# EAGLE board ENGI301 Project Actual (EAGLE 8.7.1)
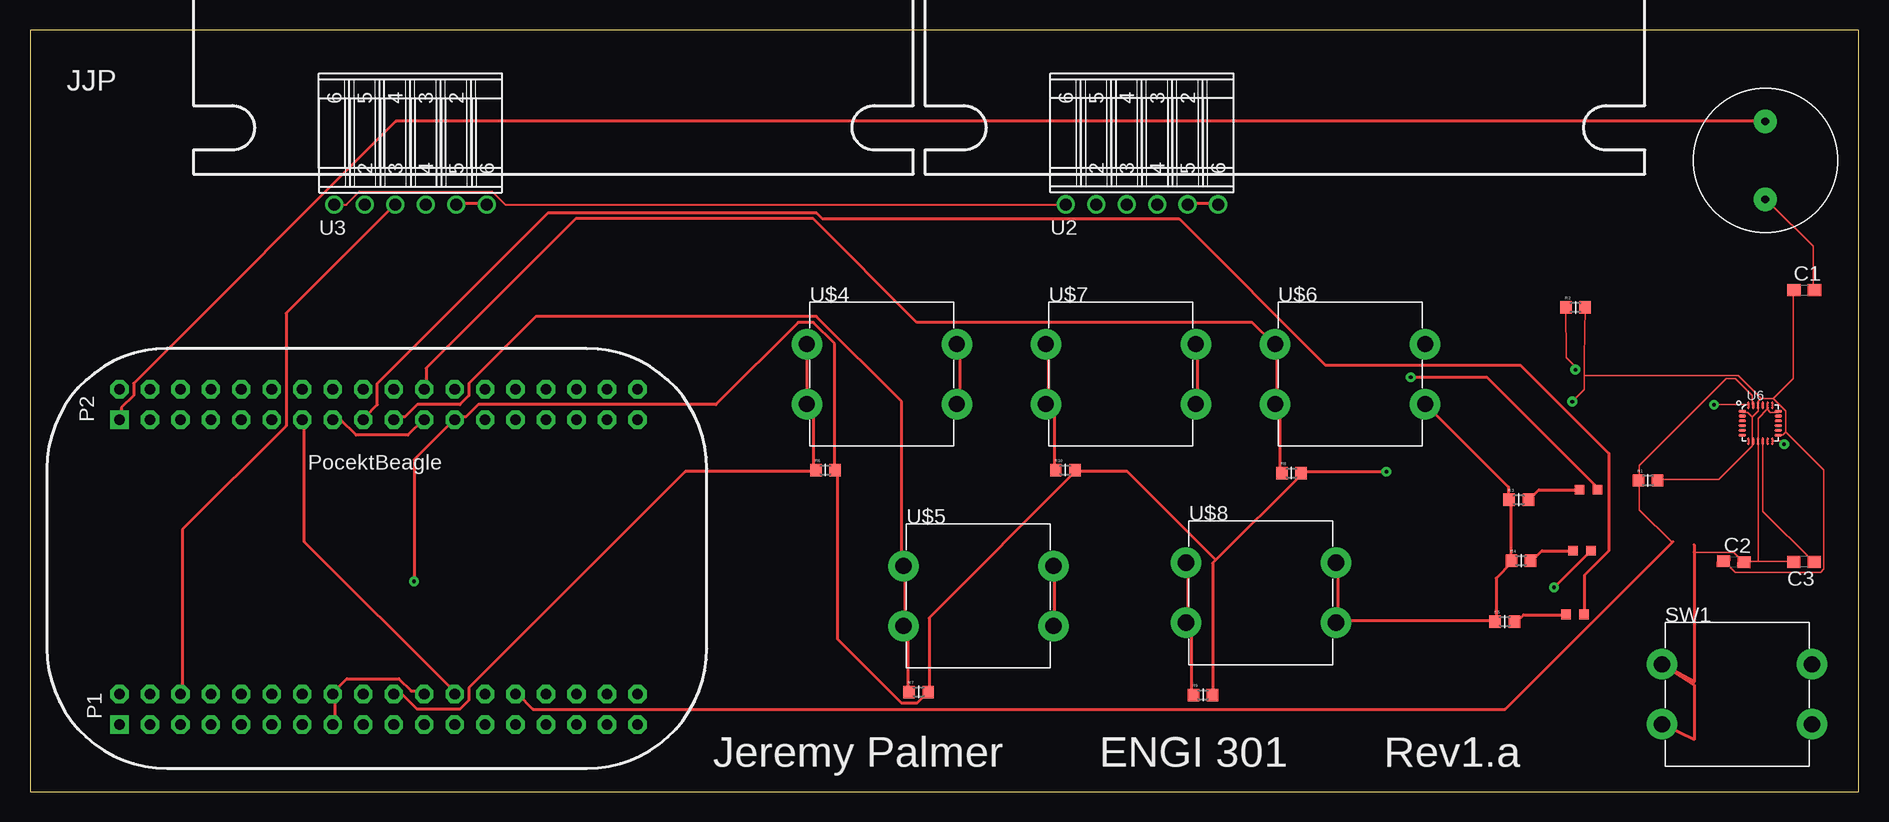
[diagram p0: board, top side]
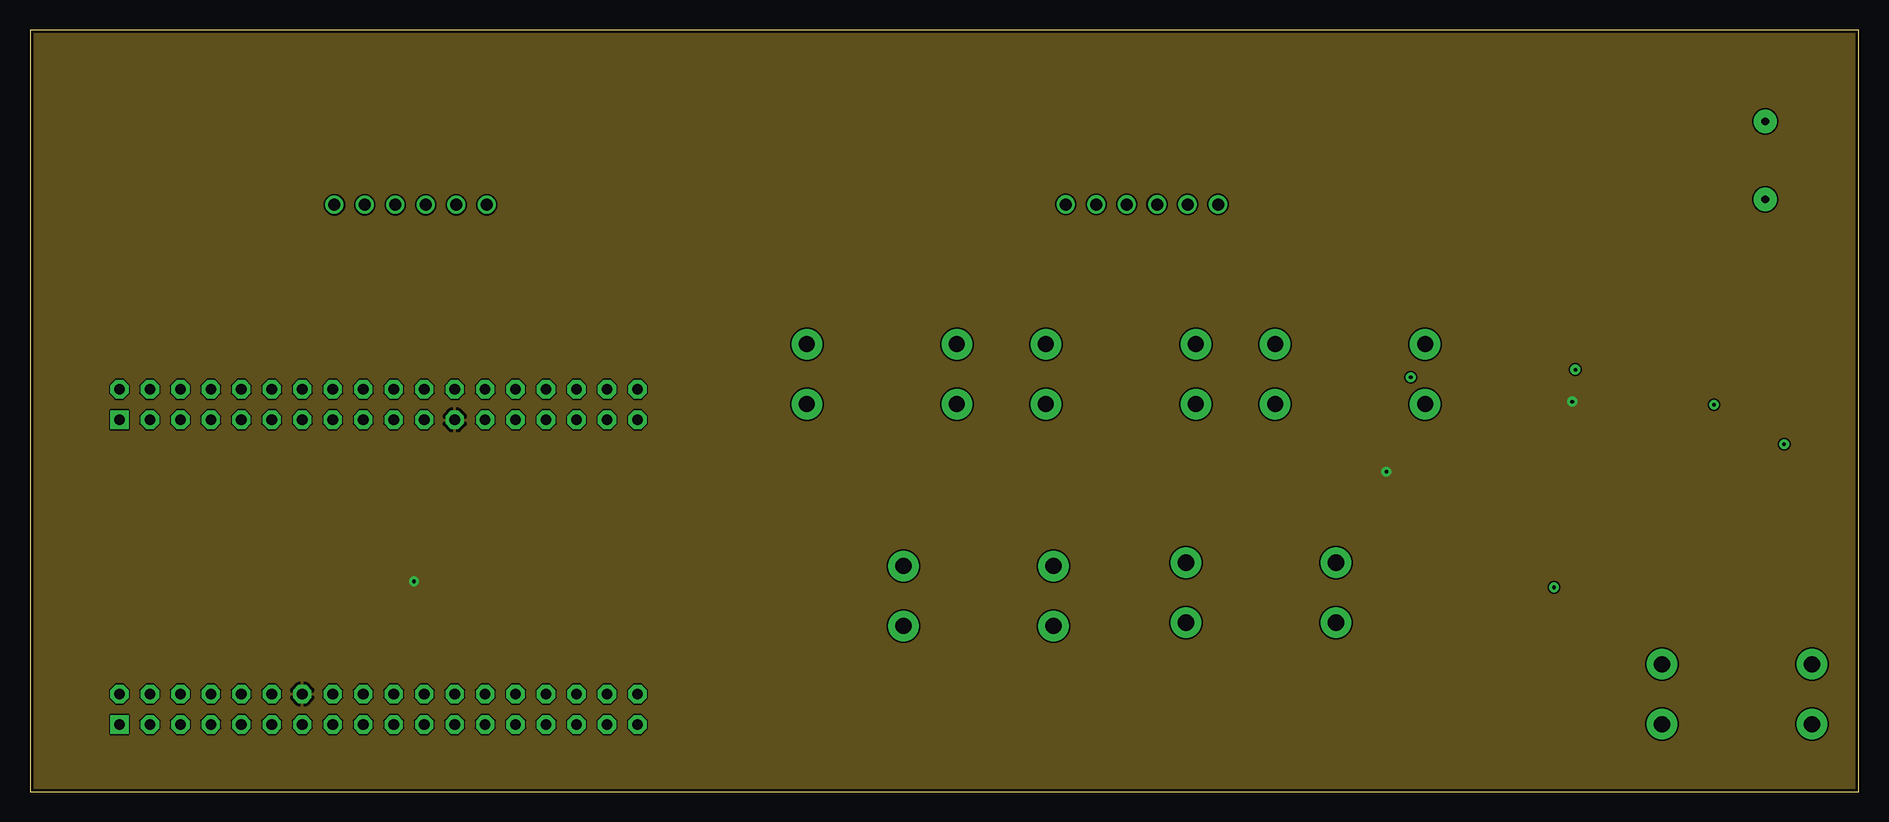
[diagram p1: board, inner layer Route2]
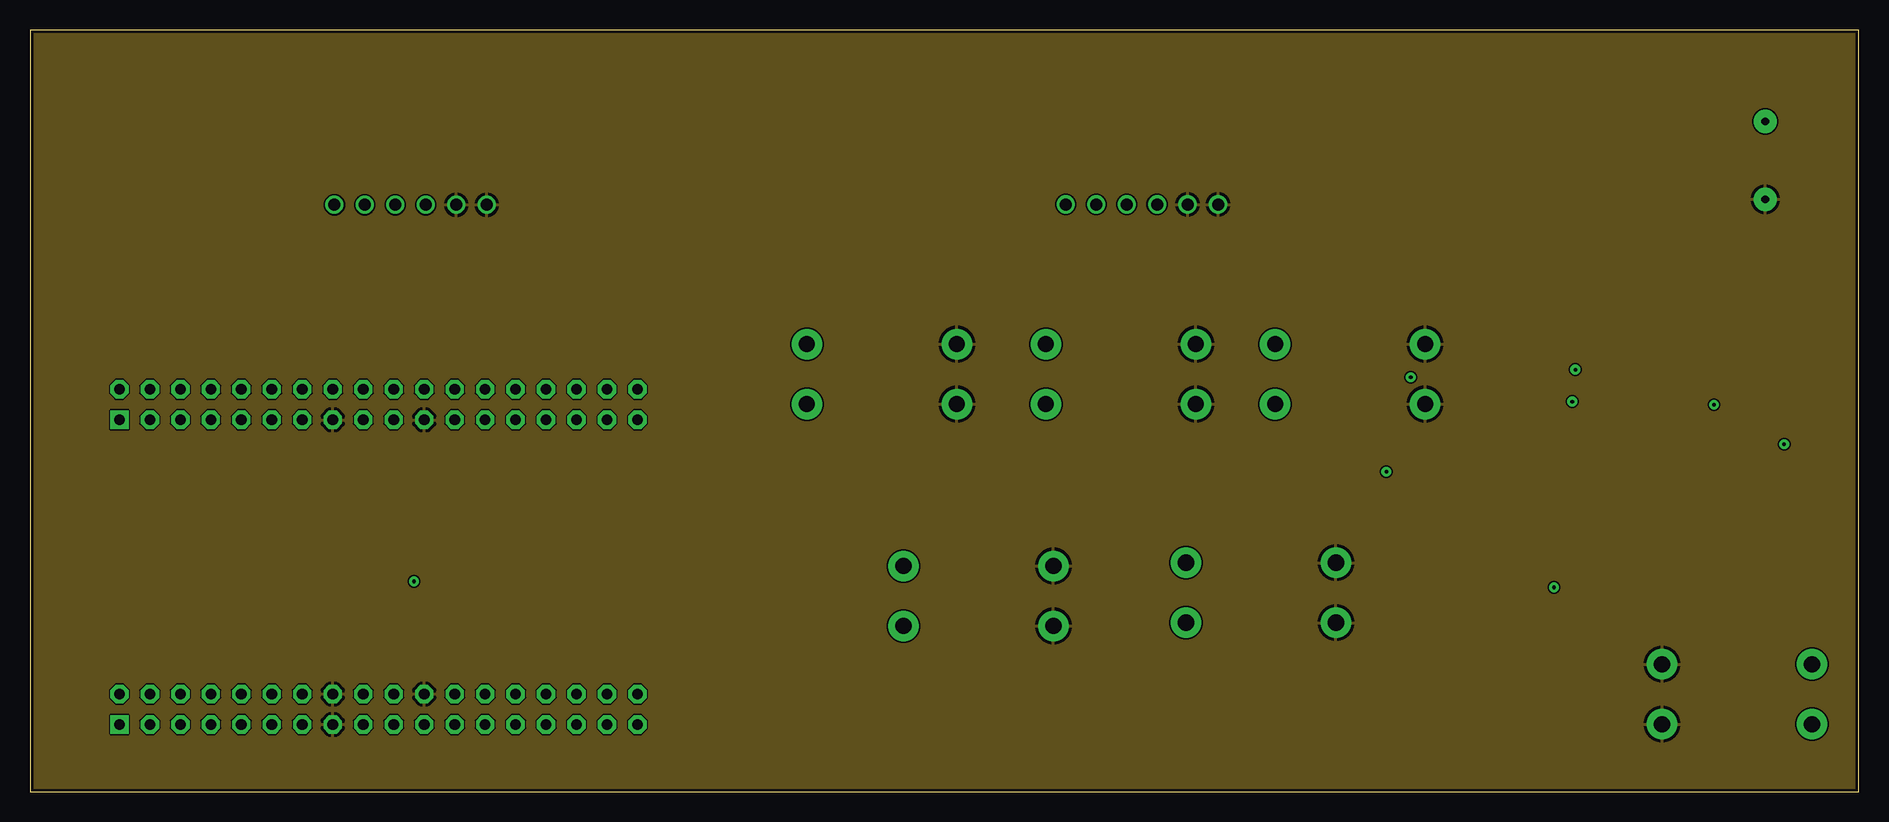
[diagram p2: board, inner layer Route15]
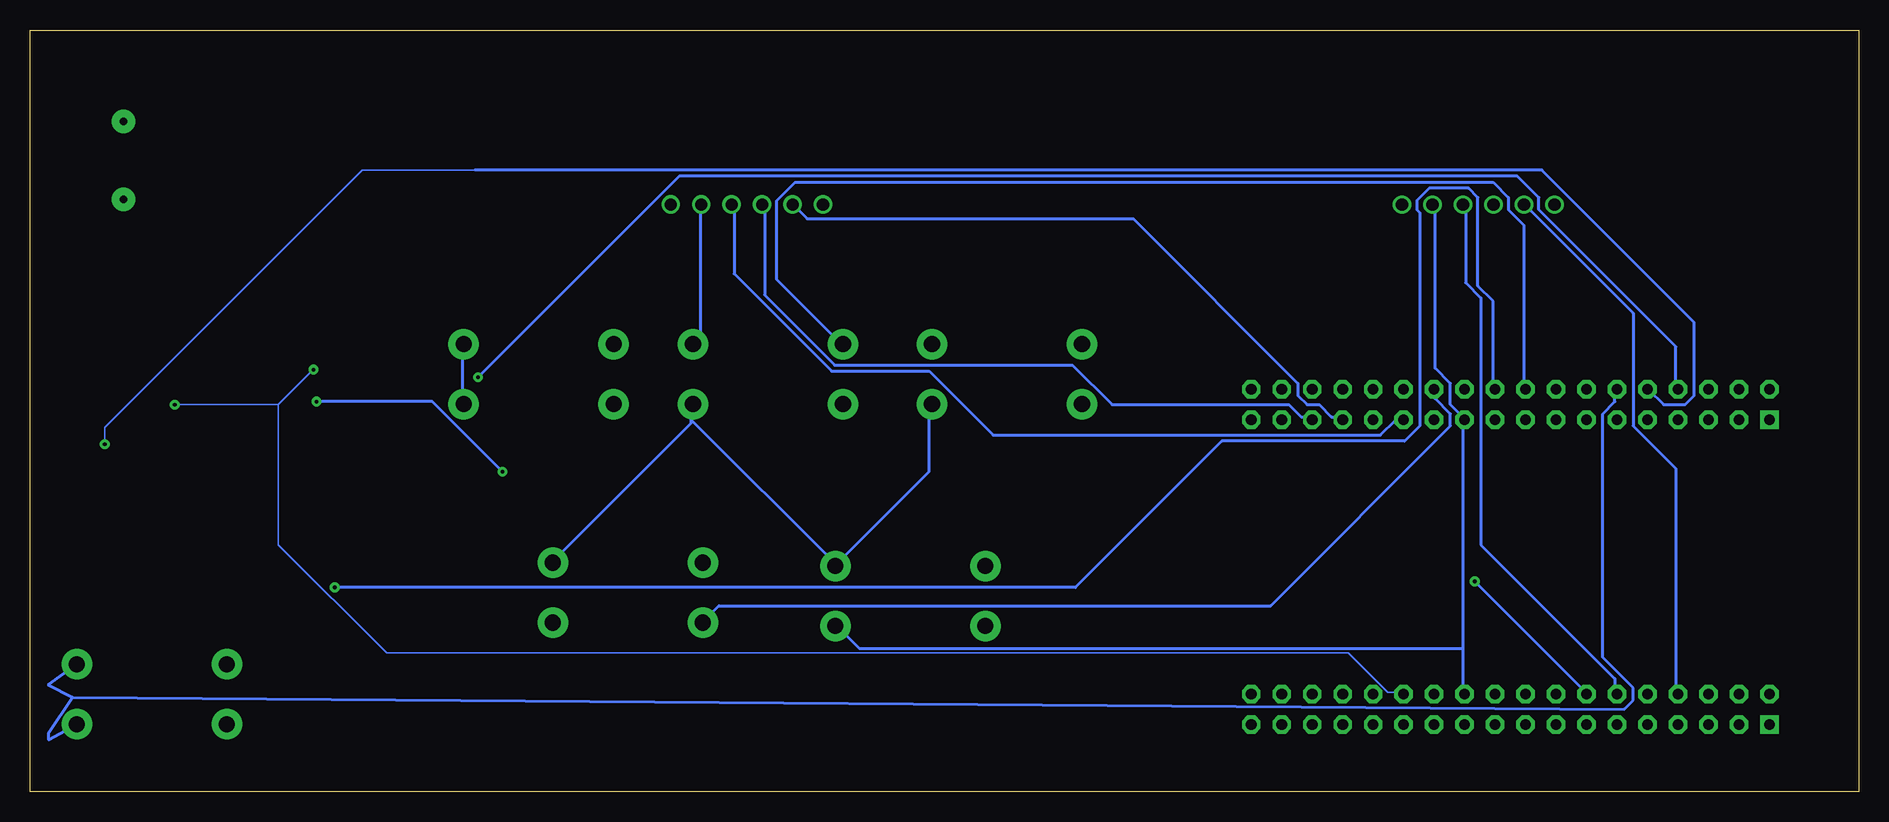
[diagram p3: board, bottom side, seen from below]

Size 152.4 x 63.5 mm. Coordinates in mm from the lower left corner, seen from the top.
Outline: 0,0 152.4,0 152.4,63.5 0,63.5 0,0
Copper layers (1*2*15*16): Top 0.035mm / dielectric 0.23mm / Route2 0.035mm / dielectric 0.93mm / Route15 0.035mm / dielectric 0.23mm / Bottom 0.035mm
Design rules "ENGI301_Maze_Project_4lyr *": minimum track width 5mil, minimum drill 12mil, track to track 5mil, track to pad 5mil, pad to pad 5mil, via to via 10mil, smd to smd 10mil, copper to edge 10mil, drill to drill 12mil, minimum pad ring 10mil, minimum via ring 10mil, stop-mask expansion 3mil, vias tented up to drill 25mil, thermal gap 10mil

## Footprints (pad centres in the part's own frame; a part is rotated, then mirrored left to right if it is on the bottom)
C0603 = smd 1.1 x 1: 1 -0.85,0; 2 0.85,0
R0603 = smd 0.95 x 1.031: 1 -0.8,0; 2 0.8,0
BUTTON = drill 1.35 pad 2.54: P$1 -6.25,2.5; P$2 -6.25,-2.5; P$3 6.25,2.5; P$4 6.25,-2.5
POCKETBEAGLE = drill 0.889 pad 1.524 square: 1 5.91,3.53; 37 5.91,28.93 | drill 0.889 pad 1.524 octagon: 2 5.91,6.07; 3 8.45,3.53; 4 8.45,6.07; 5 10.99,3.53; 6 10.99,6.07; 7 13.53,3.53; 8 13.53,6.07; 9 16.07,3.53; 10 16.07,6.07; 11 18.61,3.53; 12 18.61,6.07; 13 21.15,3.53; 14 21.15,6.07; 15 23.69,3.53; 16 23.69,6.07; 17 26.23,3.53; 18 26.23,6.07; 19 28.77,3.53; 20 28.77,6.07; 21 31.31,3.53; 22 31.31,6.07; 23 33.85,3.53; 24 33.85,6.07; 25 36.39,3.53; 26 36.39,6.07; 27 38.93,3.53; 28 38.93,6.07; 29 41.47,3.53; 30 41.47,6.07; 31 44.01,3.53; 32 44.01,6.07; 33 46.55,3.53; 34 46.55,6.07; 35 49.09,3.53; 36 49.09,6.07; 38 5.91,31.47; 39 8.45,28.93; 40 8.45,31.47; 41 10.99,28.93; 42 10.99,31.47; 43 13.53,28.93; 44 13.53,31.47; 45 16.07,28.93; 46 16.07,31.47; 47 18.61,28.93; 48 18.61,31.47; 49 21.15,28.93; 50 21.15,31.47; 51 23.69,28.93; 52 23.69,31.47; 53 26.23,28.93; 54 26.23,31.47; 55 28.77,28.93; 56 28.77,31.47; 57 31.31,28.93; 58 31.31,31.47; 59 33.85,28.93; 60 33.85,31.47; 61 36.39,28.93; 62 36.39,31.47; 63 38.93,28.93; 64 38.93,31.47; 65 41.47,28.93; 66 41.47,31.47; 67 44.01,28.93; 68 44.01,31.47; 69 46.55,28.93; 70 46.55,31.47; 71 49.09,28.93; 72 49.09,31.47
FE06W = drill 1.016: 1 -6.35,0; 2 -3.81,0; 3 -1.27,0; 4 1.27,0; 5 3.81,0; 6 6.35,0
QFN3 = smd 0.6 x 0.2: P$1 -1.5,1; P$2 -1.5,0.6; P$3 -1.5,0.2; P$4 -1.5,-0.2; P$5 -1.5,-0.6; P$6 -1.5,-1; P$13 1.5,-1; P$14 1.5,-0.6; P$15 1.5,-0.2; P$16 1.5,0.2; P$17 1.5,0.6; P$18 1.5,1 | smd 0.2 x 0.6: P$7 -1,-1.5; P$8 -0.6,-1.5; P$9 -0.2,-1.5; P$10 0.2,-1.5; P$11 0.6,-1.5; P$12 1,-1.5; P$19 1,1.5; P$20 0.6,1.5; P$21 0.2,1.5; P$22 -0.2,1.5; P$23 -0.6,1.5; P$24 -1,1.5
LED = smd 0.8 x 0.8: P$1 -0.75,0; P$2 0.75,0
BUZZER = drill 0.65 pad 1.93: P$1 0,3.25; P$2 0,-3.25

## Placement (x,y rotation side)
C1  0.1uF  [C0603]  147.86,41.81 0 top
C2  10uF  [C0603]  141.97,19.17 357.4 top
C3  0.1uF  [C0603]  147.83,19.17 180 top
R1  2.2k  [R0603]  134.83,25.94 0 top
R2  2.2k  [R0603]  128.8,40.36 0 top
R3  1k  [R0603]  124.06,24.33 0 top
R4  1k  [R0603]  124.25,19.25 0 top
R5  1k  [R0603]  122.9,14.17 0 top
R6  [R0603]  66.29,26.8 0 top
R7  [R0603]  74.05,8.3 0 top
R8  [R0603]  105.12,26.55 0 top
R9  [R0603]  97.75,8.05 0 top
R10  [R0603]  86.28,26.8 0 top
SW1  [BUTTON]  142.25,8.11 0 top
U1  POCKETBEAGLE  [POCKETBEAGLE]  1.54,2.06 0 top
U2  MOD-LED8X8RGB-CONN  [FE06W]  92.66,48.95 0 top
U3  MOD-LED8X8RGB-CONN  [FE06W]  31.71,48.93 0 top
U6  [QFN3]  144.2,30.71 0 top
U$1  [LED]  129.87,25.18 0 top
U$2  [LED]  129.33,20.1 0 top
U$3  [LED]  128.75,14.77 0 top
U$4  [BUTTON]  70.99,34.81 0 top
U$5  [BUTTON]  79.04,16.31 0 top
U$6  [BUTTON]  110.01,34.81 0 top
U$7  [BUTTON]  90.9,34.81 0 top
U$8  [BUTTON]  102.58,16.58 0 top
U$10  [BUZZER]  144.61,52.63 0 top
U$11  [MOD-LED8X8RGB]  73.61,51.49 90 top
U$12  [MOD-LED8X8RGB]  73.61,112.45 90 top  (outside the outline)
U$13  [MOD-LED8X8RGB]  134.57,51.49 90 top
U$14  [MOD-LED8X8RGB]  134.57,112.45 90 top  (outside the outline)

## Library data of the parts
C1-C3 R1-R10 SW1 U1-U3 U6 U$1-U$8 U$10 = ENGI301 Project 2a
U$11-U$14 = ENGI301_Maze_Project_Parts

## Nets
BTN0: R6.1 U1.20 U$4.P$1 U$4.P$2
BTN1: R7.1 U1.55 U$5.P$1 U$5.P$2
BTN2: R8.1 U1.58 U$6.P$1 U$6.P$2
BTN3: R10.1 U1.54 U$7.P$1 U$7.P$2
BTN4: R9.1 U1.60 U$8.P$1 U$8.P$2
BUZZER: U1.37 U$10.P$1
GND: C1.2 C2.2 C3.2 R3.1 R4.1 R5.1 SW1.P$1 SW1.P$2 U1.15 U1.16 U1.22 U1.51 U1.57 U2.5 U2.6 U3.5 U3.6 U6.P$9 U6.P$18 U6.P$20 U$4.P$3 U$4.P$4 U$5.P$3 U$5.P$4 U$6.P$3 U$6.P$4 U$7.P$3 U$7.P$4 U$8.P$3 U$8.P$4 U$10.P$2
I2C2.SCL: R1.1 U1.28 U6.P$23
I2C2.SDA: R2.1 U1.26 U6.P$24
LED0: U1.44 U$1.P$2
LED1: U1.56 U$2.P$2
LED2: U1.53 U$3.P$2
LED_ARRAY0.CS: U1.67 U2.3
LED_ARRAY0.MOSI: U1.61 U2.4
LED_ARRAY0.SCLK: U1.65 U2.2
LED_ARRAY1.CS: U1.6 U3.3
LED_ARRAY1.MOSI: U1.12 U3.4
LED_ARRAY1.SCLK: U1.8 U3.2
MPU_TNT: U1.46 U6.P$12
N$1: SW1.P$3 SW1.P$4 U1.48
N$21: U2.1 U3.1
N$23: R3.2 U$1.P$1
N$24: R4.2 U$2.P$1
N$25: R5.2 U$3.P$1
N$32: C3.1 U6.P$10
SYS_VDD1_3P3V: C1.1 C2.1 R1.2 R2.2 R6.2 R7.2 R8.2 R9.2 R10.2 U1.14 U1.59 U6.P$1 U6.P$8 U6.P$13 U6.P$22
SYS_VDD1_5V: U1.24 U1.49

## Tracks (layer width: path | path; a pad name or v marks a point on that pad's centre or on a via)
BTN0
  Top 0.254: U1.20 30.48,8.13 30.99,8.13 32.26,6.86 35.81,6.86 36.58,7.62 36.58,8.64 54.61,26.67 65.28,26.67 R6.1 65.28,26.92 65.28,31.75 64.77,32.26 U$4.P$2 64.77,32.51 64.77,37.08 U$4.P$1
BTN1
  Top 0.254: R7.1 73.15,8.38 73.15,13.46 72.9,13.72 U$5.P$2 72.9,13.97 72.9,18.8 U$5.P$1 72.64,19.05 72.64,32.51 65.53,39.62 42.16,39.62 36.58,34.04 36.58,33.02 35.81,32.26 32.26,32.26 31.24,31.24 30.48,31.24 U1.55
BTN2
  Top 0.254: R8.1 104.14,26.67 104.14,32 103.89,32.26 U$6.P$2 103.89,32.51 103.89,37.08 U$6.P$1 103.63,37.34 101.85,39.12 73.91,39.12 65.28,47.75 45.47,47.75 33.02,35.31 33.02,33.78 U1.58
BTN3
  Top 0.254: R10.1 85.34,26.92 85.34,31.75 84.84,32.26 U$7.P$2 84.84,32.51 84.84,37.08 U$7.P$1
  Bottom 0.254: U1.54 27.94,33.78 27.94,47.24 29.21,48.51 29.21,49.53 30.48,50.8 88.65,50.8 90.17,49.28 90.17,42.67 84.84,37.34 U$7.P$1
BTN4
  Top 0.254: R9.1 96.77,8.13 96.77,13.72 96.52,13.97 U$8.P$2 96.52,14.22 96.52,19.05 U$8.P$1
  Bottom 0.254: U1.60 35.31,33.53 35.31,32.77 34.04,31.5 34.04,30.48 49.02,15.49 95,15.49 96.27,14.22 U$8.P$2
BUZZER
  Top 0.254: U$10.P$1 30.48,55.88 8.64,34.04 8.64,33.02 7.62,32 7.62,31.24 U1.37
GND
  Top 0.127: C1.2 148.59,41.91 148.59,45.47 145.03,49.02 U$10.P$2 | 144.02,29.21 144.02,31.11 144.78,31.88 | 144.78,31.88 144.78,32.13 U6.P$20 | 144.78,31.88 145.03,31.62 145.67,31.62 U6.P$18 | 144.02,19.18 146.94,19.18 C3.2 | 144.02,19.18 142.88,19.18 C2.2 142.75,19.18 141.99,19.94 138.68,19.94 | 144.02,19.18 144.02,29.21 | 144.02,29.21 U6.P$9
  Top 0.254: SW1.P$2 138.68,4.32 138.68,8.89 SW1.P$1 138.68,9.14 138.68,19.94 138.68,20.57 | 145.03,49.02 144.78,49.28 U$10.P$2 | U1.15 25.4,5.84 25.4,8.13 U1.16 25.4,8.38 26.42,9.4 30.73,9.4 31.75,8.38 32.77,8.38 U1.22 | U3.5 35.56,49.02 37.85,49.02 U3.6 | U1.51 25.4,30.99 25.91,30.99 27.18,29.72 31.5,29.72 32.77,30.99 U1.57 | U$4.P$4 77.47,32.51 77.47,37.08 U$4.P$3 | U$5.P$4 85.34,13.97 85.34,18.8 U$5.P$3 | U2.5 96.52,49.02 98.81,49.02 U2.6 | U$7.P$4 97.28,32.51 97.28,37.08 U$7.P$3 | 108.97,14.22 108.97,19.05 U$8.P$3 | U$6.P$4 116.33,32.26 123.19,25.4 123.19,24.38 R3.1 123.44,24.13 123.44,19.3 R4.1 123.44,19.05 122.17,17.78 122.17,14.22 R5.1 121.92,14.22 108.97,14.22 | 108.97,14.22 U$8.P$4
  Bottom 0.254: U3.5 35.31,48.77 35.31,35.31 34.04,34.04 34.04,32.26 33.02,31.24 U1.57 33.02,30.99 33.02,11.94 | 33.02,11.94 33.02,8.38 U1.22 | U$4.P$4 77.47,32.26 77.47,26.67 85.09,19.05 U$5.P$3 85.34,19.05 97.28,30.99 | U2.5 96.52,48.77 96.52,37.85 97.03,37.34 U$7.P$3 | U$6.P$3 116.33,37.08 116.33,32.51 U$6.P$4 | 97.28,30.99 97.28,30.73 108.71,19.3 U$8.P$3 | 97.28,30.99 97.28,32.26 U$7.P$4 | 33.02,11.94 83.31,11.94 85.09,13.72 U$5.P$4
  pour Route15: -5.08,-5.08 157.48,-5.08 157.48,69.6 -5.08,69.6
I2C2.SCL
  Top 0.127: U6.P$23 143.51,32.26 143.51,33.02 142.11,34.42 141.35,34.42 134.11,27.18 134.11,26.04 R1.1 134.11,25.91 134.11,23.5 136.84,20.77
  Top 0.254: 136.91,20.83 136.84,20.77 122.94,6.86 41.91,6.86 40.64,8.13 U1.28
I2C2.SDA  (via drill 0.3)
  Top 0.127: v140.34,32.26 143.13,32.26 U6.P$24 | v128.78,35.18 128.78,35.43 128.02,36.2 R2.1
  Bottom 0.127: 131.7,32.26 v140.34,32.26 | v128.78,35.18 131.7,32.26 | 131.7,32.26 131.7,20.57 122.68,11.56 42.55,11.56 39.24,8.26 37.97,8.26 U1.26
LED0  (via drill 0.3)
  Top 0.254: v115.06,34.54 121.41,34.54 130.56,25.4 U$1.P$2
  Bottom 0.254: v115.06,34.54 98.3,51.31 28.45,51.31 26.67,49.53 26.67,48.51 15.24,37.08 15.24,33.78 U1.44
LED1  (via drill 0.3)
  Top 0.254: v127,17.02 130.05,20.07 U$2.P$2
  Bottom 0.254: v127,17.02 65.28,17.02 53.09,29.21 37.85,29.21 36.58,30.48 36.58,48.26 36.83,48.51 36.83,49.28 35.81,50.29 32.51,50.29 31.75,49.53 31.75,42.16 30.48,40.89 30.48,33.78 U1.56
LED2
  Top 0.254: U$3.P$2 129.54,14.99 129.54,18.03 131.57,20.07 131.57,28.19 124.21,35.56 107.95,35.56 95.76,47.75 66.04,47.75 65.53,48.26 43.18,48.26 28.96,34.04 28.96,32.26 27.94,31.24 U1.53
LED_ARRAY0.CS
  Bottom 0.254: U1.67 45.72,31.24 46.48,31.24 47.5,32.26 62.23,32.26 65.53,35.56 85.34,35.56 91.19,41.4 91.19,48.77 U2.3
LED_ARRAY0.MOSI
  Bottom 0.254: U1.61 38.1,30.99 38.61,30.99 39.88,29.72 72.14,29.72 77.47,35.05 85.6,35.05 93.73,43.18 93.73,48.77 U2.4
LED_ARRAY0.SCLK
  Bottom 0.254: U1.65 43.18,31.24 43.94,31.24 44.96,32.26 45.97,32.26 46.74,33.02 46.74,34.04 60.45,47.75 87.63,47.75 88.65,48.77 U2.2
LED_ARRAY1.CS
  Top 0.254: U1.6 12.7,8.38 12.7,21.84 21.34,30.48 21.34,39.88 30.23,48.77 U3.3
LED_ARRAY1.MOSI
  Bottom 0.254: U1.12 20.32,8.38 20.32,9.4 31.5,20.57 31.5,41.15 32.77,42.42 32.77,48.77 U3.4
LED_ARRAY1.SCLK
  Bottom 0.254: U1.8 15.24,8.38 15.24,26.92 18.8,30.48 18.8,39.88 27.69,48.77 U3.2
MPU_TNT  (via drill 0.3)
  Top 0.127: U6.P$12 145.92,29.21 v146.18,28.96
  Bottom 0.127: v146.18,28.96 146.18,30.35 124.71,51.82 115.32,51.82
  Bottom 0.254: 115.32,51.82 26.42,51.82 13.72,39.12 13.72,33.02 14.48,32.26 16.26,32.26 17.53,33.53 U1.46
N$1
  Bottom 0.254: 148.84,7.87 19.56,6.86 18.8,7.62 18.8,8.64 21.34,11.18 21.34,31.5 20.32,32.51 20.32,33.53 U1.48 | 148.84,7.87 150.88,8.89 SW1.P$3 | 148.84,7.87 150.88,4.83 150.88,4.32 SW1.P$4
N$21
  Top 0.152: U2.1 86.29,48.93 39.61,48.93 38.51,50.02 27.45,50.02 26.36,48.93 U3.1
N$23
  Top 0.254: U$1.P$1 129.03,25.15 125.73,25.15 124.97,24.38 R3.2
N$24
  Top 0.254: U$2.P$1 128.52,20.07 125.98,20.07 125.22,19.3 R4.2
N$25
  Top 0.254: U$3.P$1 127.76,14.73 124.46,14.73 123.95,14.22 R5.2
N$32
  Top 0.127: U6.P$10 144.4,23.37 148.59,19.18 C3.1
SYS_VDD1_3P3V  (via drill 0.3)
  Top 0.127: 143.51,31.24 143.51,29.21 | 143.51,31.24 143.13,31.62 142.75,31.62 U6.P$1 | 143.51,29.21 143.51,28.83 140.72,26.04 135.64,26.04 R1.2 | 143.51,29.21 U6.P$8 | 129.54,34.67 129.54,33.53 v128.52,32.51 | 129.54,34.67 129.54,36.2 R2.2 | 146.3,29.97 146.05,29.72 145.8,29.72 U6.P$13 | 146.3,29.97 146.3,31.75 145.29,32.77 | 144.27,32.77 145.29,32.77 | 144.27,32.77 144.02,32.51 144.02,32.26 U6.P$22 144.02,32.13 144.02,31.75 143.51,31.24 | 146.3,29.97 149.48,26.8 149.48,18.54 149.22,18.29 142.11,18.29 141.22,19.18 C2.1 | 145.29,32.77 146.94,34.42 146.94,41.78 C1.1 | 129.54,34.67 142.37,34.67 144.27,32.77
  Top 0.254: v32,17.53 32,27.69 35.31,30.99 U1.59 35.56,31.24 36.32,31.24 37.34,32.26 57.15,32.26 64.01,39.12 65.28,39.12 67.06,37.34 67.06,26.92 R6.2 67.31,26.67 67.31,12.7 72.64,7.37 73.91,7.37 74.68,8.13 R7.2 74.93,8.38 74.93,14.48 87.12,26.67 | 98.81,19.3 105.92,26.42 R8.2 106.17,26.67 v113.03,26.67 | 98.81,19.3 98.55,19.05 98.55,8.13 R9.2 | 87.12,26.67 91.44,26.67 98.81,19.3 | 87.12,26.67 R10.2
  Bottom 0.254: v32,17.53 22.86,8.38 U1.14 | v128.52,32.51 118.87,32.51 v113.03,26.67
  pour Route2: -2.54,-2.54 154.94,-2.54 154.43,66.04 -3.05,66.04
SYS_VDD1_5V
  Top 0.254: U1.49 22.86,30.99 22.86,20.83 35.31,8.38 U1.24

## Text on the board
tSilk: JJP | Jeremy Palmer ENGI 301 Rev1.a